# Altium PCB 800U R3N3_SENSOR_V1.3.PcbDoc
Units mm, origin at the board's own origin, x right, y up, seen from the top; angles counter-clockwise.
Board outline 152.4 x 101.6 mm, 2 copper layers (Top Layer, Bottom Layer); 17 components, 10 nets, 29 pads, 17 vias.
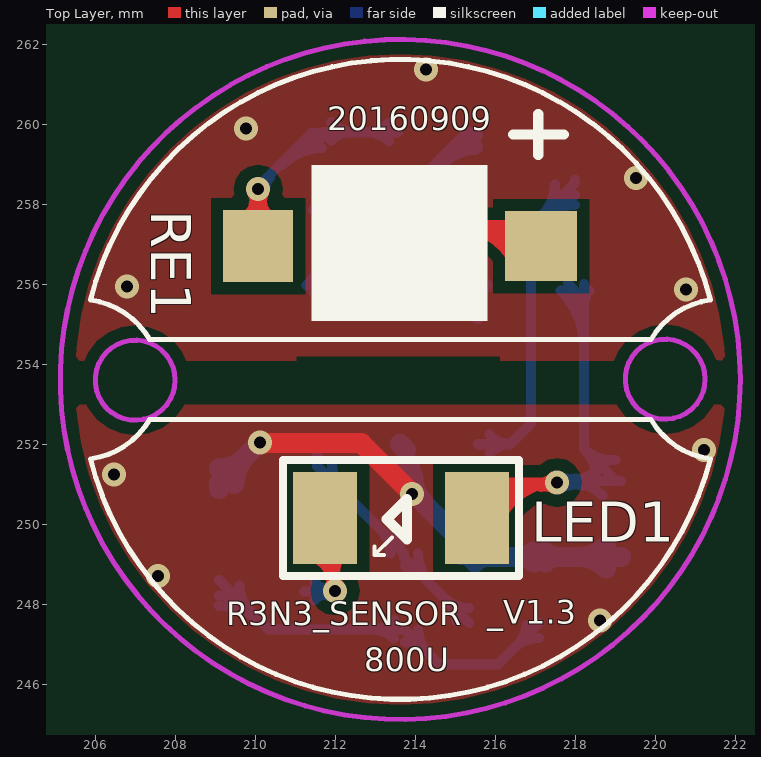
[diagram p0: Top Layer view]
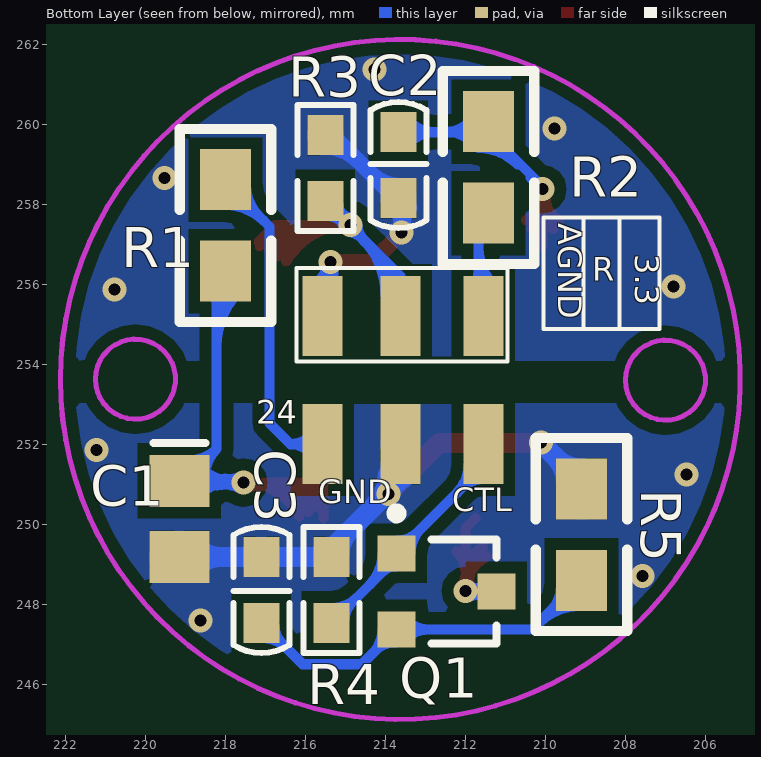
[diagram p1: Bottom Layer view, seen from below]

## Layer stack, top to bottom
Top Layer: signal copper 0.0356
Dielectric: dielectric 0.32, FR-4, Dk 4.8
Bottom Layer: signal copper 0.0356

## Board outline
162.425,214.025 314.825,214.025 314.825,315.625 162.425,315.625

## Design rules (kind name [scope] priority, off if disabled: settings)
Clearance [All] p1: gap=0.3
PlaneConnect [Isvia] p1: planeconnectstyle=Relief reliefexpansion=0.508 reliefentries=4 reliefconductorwidth=0.254 reliefairgap=0.254
PolygonConnect [Isvia] p1: connectstyle=Direct reliefconductorwidth=0.254 reliefentries=4 polygonreliefangle="90 Angle" airgapwidth=0.254
RoutingVias [All] p1: holewidth=0.3 width=0.6 viastyle="Through Hole" minholewidth=0.3 minwidth=0.6 maxholewidth=0.3 maxwidth=0.6
SilkToSolderMaskClearance SilkscreenOverComponentPads [IsPad] p1: minsilkscreentomaskgap=0.254 clearancetoexposedcopper=TRUE
SolderMaskExpansion [All] p1: expansion=0.102
Width [All] p1: maxlimit=0.6 minlimit=0.254 preferedwidth=0.254 minimp=50.000000 maximp=50.000000 favimp=50.000000
26 further rules are at their usual default settings.

## Classes and differential pairs
component class "800U R3N3_TR": 3.3 24 C1 C2 C3 CTL GND LED1 Q1 R R1 R2 R3 R4 R5 RE1

## Components (designator, comment, footprint, x,y, rotation, side; value= is the part's Value field where it differs from the comment)
3.3 "" HOLE_SMD 211.55,255.21 r180 bottom (schematic designator 2)
24 "" HOLE_SMD 215.575,252 r180 bottom (schematic designator 1)
AGND "" HOLE_SMD 215.575,255.21 r180 bottom (schematic designator LEDCTL1)
C1 "105" C0805 219.15,250.13 r270 bottom
C2 "105" C0603 213.675,259.8 r270 bottom
C3 "102" C0603 217.1,247.53 r90 bottom
CTL "" HOLE_SMD 211.55,252 r180 bottom (schematic designator LEDCTL1)
GND "" HOLE_SMD 213.625,252 r180 bottom (schematic designator GND1)
LED1 "SIR67-21C" LED-3.5X2.8 213.65,250.15 r180 top locked
Q1 "MMBT5551" SOT-23 212.475,248.32 r270 bottom
R "" HOLE_SMD 213.625,255.21 r180 bottom (schematic designator LED_R1)
R1 "100" R0805 218,257.47 r90 bottom
R2 "100" R0805 211.425,258.92 r270 bottom
R3 "10K" R0603 215.5,259.725 r270 bottom
R4 "10K" R0603 215.35,249.18 r270 bottom
R5 "15" R0805 209.1,249.74 r270 bottom
RE1 "PD70-01C" LED9*4 213.65,256.95 r90 top locked

## Footprints (in the part's own frame and the unit in brackets; to place one, negate y for a bottom-side part, rotate by r counter-clockwise, add the part's x,y. Pads: shape width x height; smd on the part's side, far side on the other; paste and mask are expansions set on the pad)
C0603 [mm]
  rect 1x0.9 smd: 1(0,0) 2(1.65,0)
  silkscreen extent -0.75,-0.7 2.4,0.7
C0805 [mm] "Chip Capacitor; Body 2.0 x"
  rect 1.3x1.5 smd: 1(-0.95,0) 2(0.95,0)
  silkscreen extent -1.9,-0.65 -1.9,0.65
HOLE_SMD [mm]
  rect 1x2 smd: 1(0,0)
LED9*4 [mm]
  rect 1.75x1.8 smd: 1(0,-3.5)
  rect 1.8x1.75 smd: 2(0,3.575)
  silkscreen extent -1.87,-4.06 3.3,2.24
LED-3.5X2.8 [mm]
  rect 1.6x2.3 smd: 1(-1.9,0) 2(1.9,0)
  silkscreen extent -2.95,-1.45 2.95,1.45
R0603 [mm]
  rect 1x0.9 smd: 1(0,0) 2(1.65,0)
  silkscreen extent -0.75,-0.7 2.4,0.7
R0805 [mil]
  rect 60x50 smd: 1(-45,0) 2(45,0)
  silkscreen extent -95,-45 95,45
SOT-23 [mm] "SOT-23; 3 Leads; Body 3.0 x 2.6 mm"
  rect 0.9x0.95 smd: 1(-0.95,-1.25) 2(0.95,-1.25) 3(0,1.25)
  silkscreen extent -2.07,-1.38 1.3,1.25

## Part data
3.3 24 AGND CTL GND R: library part 焊
C1: library part Cap, "贴片电容"
C2 C3: library part Cap, "贴"
LED1: library part LED0, "贴"
Q1: library part NPN, "贴片NPN三极管"
R1 R2 R3 R4 R5: library part "Res Semi", "贴"
RE1: library part "Photo Sen", "贴"

## Via types
v1: diameter 0.6, hole 0.3, Top Layer to Bottom Layer, 17 vias

## Nets (pads, with @x,y where several pads share a name; then routed paths per layer and width w, separated by ;. In a path a pad name is that pad's centre, name@x,y a point inside that pad or via, vN(x,y) a via of type N, cw(c..) or ccw(c..) an arc to the next point about the centre after c; other vN are vias at no path point)
3.3V: 3.3.1 R2.2 | length 6
  Bottom Layer w0.254: 3.3.1@211.286,255.974 ccw(c210.348,256.912) 211.675,256.912 ; R2.2@211.447,257.847 cw(c210.895,257.295) 211.675,257.295 cw(c212.455,257.295) R2.2@211.903,257.847 ; 3.3.1@211.466,255.794 ccw(c210.961,256.299) 211.675,256.299 ; 211.675,256.309 ccw(c212.149,256.309) 3.3.1@211.814,255.974 ; R2.2@211.675,258.125 211.675,255.575 3.3.1@211.875,255.375
+24V: 24.1 R1.2 | length 11.8
  Bottom Layer w0.254: 24.1 216.375,252 ; 24.1@215.861,251.76 cw(c216.375,251.329) 216.375,252 ; 24.1@215.861,252.24 ccw(c216.375,252.671) 216.375,252 ; 217.041,257.581 cw(c218,256.621) R1.2@218,257.978 ; 217.171,257.711 ccw(c216.396,258.486) R1.2@217.492,258.486 ; R1.2@217.474,258.014 cw(c218,257.488) R1.2@218,258.232 ; R1.2 218,258.54 216.9,257.44 216.9,252.525 216.375,252
AGND: AGND.1 C2.2 R3.1 | length 11.4
  Top Layer w0.4: v1(213.6,257.29) 214.33,256.56 v1(215.375,256.56)
  Bottom Layer w0.4: C2.2@213.398,257.923 cw(c212.971,257.496) 213.575,257.496 cw(c214.179,257.496) C2.2@213.752,257.923 ; v1@213.513,257.34 ccw(c213.218,257.511) 213.548,257.599 ; 213.575,257.592 ccw(c213.902,257.592) v1@213.671,257.361 ; C2.2@213.575,258.15 C2.2@213.575,257.975 ; C2.2@213.575,258.45 ccw(c213.575,259.597) 214.386,258.786 ; v1(213.6,257.29) 213.575,257.315 C2.2@213.575,257.975 ; C2.2@213.621,257.668 ccw(c213.985,257.571) v1@213.681,257.349 ; 214.689,259.089 cw(c215.5,258.278) R3.1@215.5,259.425 ; R3.1 215.325,259.725 C2.2@213.575,257.975 ; AGND.1 215.375,255.41 v1(215.375,256.56) ccw(c216.047,256.56) AGND.1@215.721,255.972
  other v1: 220.775,255.87 206.8,255.94 219.525,258.65 209.775,259.89 214.275,261.37
GND: C1.2 C3.2 GND.1 R4.1 R5.1 | length 20.9
  Top Layer w0.5: v1@210.105,252.03 212.655,252.03 v1(213.925,250.76)
  Bottom Layer w0.5: R5.1 209.1,251.025 v1(210.115,252.04) ; R5.1@209.1,251.395 ccw(c209.1,252.288) 209.732,251.657 ; R5.1@209.485,251.01 cw(c210.451,251.01) 209.768,251.693 ; GND.1 GND.1@213.775,251.85 ; GND.1@213.7,251.3 213.55,251.15 213.585,251.15 215.35,249.385 R4.1 C3.2 C1.2 ; GND.1@213.875,251.5 ccw(c215.42,251.5) 214.328,250.407 ; v1@213.882,250.786 ccw(c213.398,251.077) GND.1@213.946,251.213 ; v1@213.918,250.711 cw(c213.842,250.206) 214.252,250.509 ; 214.899,249.836 cw(c214.293,249.23) R4.1@215.15,249.23 ; R4.1@215.491,249.039 cw(c215.833,248.697) 215.833,249.18 cw(c215.833,249.663) R4.1@215.491,249.321 ; C3.2@216.959,249.039 ccw(c216.617,248.697) 216.617,249.18 ccw(c216.617,249.663) C3.2@216.959,249.321 ; C3.2@217.241,249.039 cw(c217.583,248.697) 217.583,249.18 cw(c217.583,249.663) C3.2@217.241,249.321 ; C1.2@218.767,248.897 ccw(c218.084,248.214) 218.084,249.18 ccw(c218.084,250.146) C1.2@218.767,249.463
  other v1: 218.625,247.59 207.575,248.7 206.475,251.24 221.225,251.85
LEDCTL: CTL.1 Q1.1 R4.2 | length 11.1
  Bottom Layer w0.254: CTL.1@211.55,251.127 cw(c211.55,250.359) 212.093,250.902 ; CTL.1 211.55,251.445 Q1.1 213.725,249.155 R4.2 ; CTL.1@211.923,251.5 ccw(c212.956,251.5) 212.226,250.769 ; 213.131,249.864 cw(c212.537,249.27) Q1.1@213.377,249.27 ; 213.191,249.804 ccw(c213.7,250.312) Q1.1@213.7,249.593 ; Q1.1@213.75,248.947 cw(c213.75,248.505) 214.062,248.818 ; Q1.1@214.073,249.27 ccw(c215.191,249.27) 214.4,248.48 ; 214.713,248.167 ccw(c215.35,248.803) R4.2@215.35,247.903 ; 214.834,248.046 cw(c214.368,247.58) R4.2@215.027,247.58
NetC1_1: C1.1 LED1.1 R1.1 | length 25.2
  Top Layer w0.254: LED1.1@215.471,250.541 cw(c216.294,250.113) LED1.1@216.294,251.04 ; LED1.1 215.55,250.95 215.64,251.04 v1(217.55,251.04) ccw(c217.55,249.458) LED1.1@216.147,250.189 ; LED1.1@215.696,250.424 cw(c216.712,249.894) 216.712,251.04 ; LED1.1@215.922,250.306 cw(c217.131,249.676) 217.131,251.04 ; v1@217.4,251.127 cw(c217.039,251.335) 217.147,250.932 cw(c217.255,250.528) v1@217.463,250.89 ; v1@217.428,250.918 ccw(c217.132,250.622) 217.132,251.04 ccw(c217.132,251.458) v1@217.428,251.162
  Bottom Layer w0.254: v1(217.55,251.04) 217.59,251.08 C1.1 219.025,251.08 218.225,251.88 ; v1@217.636,250.89 cw(c218.016,250.233) 218.213,250.966 ; v1@217.636,251.19 ccw(c217.884,251.619) 218.012,251.14 ; R1.1@217.641,255.841 cw(c216.23,254.43) 218.225,254.43 ; v1@217.672,250.918 cw(c218.064,250.526) 218.064,251.08 ; v1@217.672,251.162 ccw(c217.871,251.361) 217.871,251.08 ; v1@217.7,250.954 cw(c217.994,250.784) 217.906,251.112 ; R1.1@217.82,256.02 cw(c216.844,255.044) 218.225,255.044 ; 218.225,255.517 cw(c218.683,255.517) R1.1@218.359,255.841 ; R1.1@218.225,256.007 218.225,251.88 ; C1.1@218.527,251.103 ccw(c217.493,251.147) 218.225,251.88 ; C1.1@218.68,250.71 ccw(c217.787,249.817) 217.787,251.08 ccw(c217.787,252.343) C1.1@218.68,251.45 ; C1.1@219.001,251.601 cw(c218.91,252.565) 218.225,251.88
NetC2_1: C2.1 R2.1 RE1.2 | length 15.3
  Top Layer w0.254: RE1.2@209.659,257.597 ccw(c209.139,258.375) v1(210.075,258.375) ; RE1.2@209.8,257.386 ccw(c209.457,257.9) 210.075,257.9 ccw(c210.693,257.9) RE1.2@210.35,257.386 ; v1@209.925,258.288 cw(c209.563,258.08) 209.967,257.972 cw(c210.37,257.864) v1@210.162,258.225 ; v1@209.953,258.253 cw(c209.657,257.957) 210.075,257.957 cw(c210.493,257.957) v1@210.197,258.253 ; v1@209.988,258.225 cw(c209.78,257.864) 210.183,257.972 cw(c210.587,258.08) v1@210.225,258.288 ; RE1.2 v1(210.075,258.375) ; RE1.2@210.491,257.597 cw(c211.011,258.375) v1(210.075,258.375)
  Bottom Layer w0.254: v1@210.025,258.39 R2.1@211.425,259.79 ; v1@210.075,258.548 ccw(c210.075,258.966) 210.37,258.67 ccw(c210.666,258.375) v1@210.248,258.375 ; 210.697,258.997 cw(c211.675,258.019) R2.1@211.675,259.402 ; R2.1@211.13,259.43 cw(c211.675,258.886) R2.1@211.675,259.656 ; R2.1@211.475,259.775 211.675,259.775 211.7,259.8 C2.1@213.575,259.8 ; R2.1@211.903,259.597 cw(c212.394,259.106) 212.394,259.8 ; R2.1@211.903,260.053 ccw(c212.515,260.665) 212.515,259.8 ; C2.1@213.347,259.572 ccw(c212.795,259.02) 212.795,259.8 ccw(c212.795,260.58) C2.1@213.347,260.028
NetC3_1: C3.1 Q1.2 R5.2 | length 15.6
  Bottom Layer w0.254: R5.2@209.1,247.962 cw(c209.1,246.429) 210.184,247.513 ; R5.2@209.1,248.216 cw(c209.1,247.296) 209.75,247.947 ; R5.2 210.327,247.37 Q1.2 214.595,246.5 216.07,246.5 C3.1 ; R5.2@209.608,248.47 ccw(c210.528,248.47) 209.877,247.82 ; Q1.2@213.472,247.142 ccw(c212.92,246.59) 212.92,247.37 ccw(c212.92,248.15) Q1.2@213.472,247.598 ; Q1.2@213.75,247.047 cw(c213.75,246.328) 214.259,246.836 ; Q1.2@214.073,247.37 ccw(c214.913,247.37) 214.319,246.776 ; 216.463,246.893 cw(c217.1,246.257) C3.1@217.1,247.157 ; 216.584,247.014 ccw(c216.118,247.48) C3.1@216.777,247.48
NetLED1_2: LED1.2 Q1.3 | length 9.5
  Top Layer w0.254: LED1.2@211.45,249.198 cw(c211.007,248.309) v1@212,248.309 ; LED1.2@211.563,249.425 cw(c211.212,248.719) 212,248.719 ; LED1.2 212,249.9 v1(212,248.33) ; v1@211.85,248.417 ccw(c211.505,248.616) 211.89,248.719 ; v1@211.878,248.452 ccw(c211.582,248.748) 212,248.748 ccw(c212.418,248.748) v1@212.122,248.452 ; 211.883,248.745 ccw(c212.305,248.858) v1@212.086,248.48 ; 212,248.779 cw(c212.771,248.779) LED1.2@212.226,249.324
  Bottom Layer w0.254: Q1.3 v1@212,248.32 ; Q1.3@211.485,248.098 cw(c212,247.611) v1@212,248.32 ; Q1.3@211.485,248.542 ccw(c212,249.029) v1@212,248.32 ; Q1.3@211.558,248.32 ccw(c211.558,248.772) v1@211.878,248.452 ; Q1.3@211.606,248.32 cw(c211.606,247.936) v1@211.878,248.208 ; v1@211.843,248.258 ccw(c211.589,248.141) 211.662,248.411 ccw(c211.726,248.652) v1@211.888,248.462 ; v1@211.842,248.401 cw(c211.545,248.537) 211.629,248.221 cw(c211.724,247.867) v1@211.911,248.181 ; v1(212,248.33) v1@212,248.32
NetLED_R1_1: R3.2 R.1 RE1.1 | length 21.3
  Top Layer w0.254: v1@214.962,257.33 cw(c215.17,256.968) 215.278,257.372 cw(c215.386,257.775) v1@215.025,257.567 ; v1@214.997,257.358 cw(c215.293,257.062) 215.293,257.48 cw(c215.293,257.898) v1@214.997,257.602 ; 215.322,257.48 cw(c215.322,255.875) RE1.1@216.701,256.697 ; 215.769,257.48 cw(c215.769,256.142) RE1.1@216.919,256.827 ; 216.217,257.48 cw(c216.217,256.408) RE1.1@217.137,256.957 ; RE1.1@216.483,256.567 ccw(c214.875,255.609) v1(214.875,257.48) 216.755,257.48 RE1.1@217.175,257.06 ; RE1.1@216.925,257.175 RE1.1
  Bottom Layer w0.254: R.1@213.49,255.71 cw(c214.347,255.71) 213.741,256.316 ; R.1@213.625,255.375 213.625,256.2 R3.2 R3.2@215.595,258.17 ; R.1@213.744,255.71 cw(c215.214,255.71) 214.175,256.75 ; R.1@213.998,255.71 cw(c216.081,255.71) 214.608,257.183 ; 214.524,257.061 cw(c215.017,256.723) v1@214.907,257.31 ; 214.558,257.133 ccw(c214.212,257.48) v1@214.702,257.48 ; 214.631,257.206 cw(c214.875,256.962) v1@214.875,257.307 ; v1@214.843,257.65 ccw(c214.755,258.122) R3.2@215.17,257.882 ; v1@214.863,257.438 cw(c215.5,256.802) R3.2@215.5,257.702 ; v1@214.875,257.653 ccw(c214.875,258.143) R3.2@215.222,257.797 ; v1@214.94,257.64 ccw(c215.073,257.972) R3.2@215.252,257.663 ; v1@214.984,257.559 ccw(c214.518,258.025) R3.2@215.177,258.025 ; v1@215.042,257.435 cw(c215.346,257.354) R3.2@215.189,257.626 ; v1@215.048,257.48 cw(c215.393,257.48) R3.2@215.149,257.724

## Polygon pours and split planes (outlines as drawn)
AGND on Top Layer "B" (solid, remove dead copper, pour order 2): 205.225,262.1 222.075,262.1 222.075,254.215 222.2,254.09 205.225,254.09
GND on Top Layer "T" (solid, remove dead copper, pour order 8): 205.175,252.99 222.175,252.99 222.175,245.14 205.345,245.14 205.225,245.26 205.195,245.23 205.175,245.23
AGND on Bottom Layer "B" (solid, remove dead copper, pour order 4): 205.125,262.1 222.05,262.1 222.05,254.09 205.1,254.09 205.15,254.14 205.15,262.08
GND on Bottom Layer "B" (solid, remove dead copper, pour order 6): 205,253.02 222.525,253.02 222.525,245.045 222.5,245.02 205.065,245.02 205.025,244.98

## Keep-outs
Keep-Out Layer:
  circle w0.127: c207,253.6 r1
  circle w0.127: c220.25,253.625 r1
  circle w0.127: c213.629,253.619 r8.5

## Other copper
Top Layer:
  pour cut-out: 211.025,254.2 216.125,254.2 216.125,253 211.025,253
Bottom Layer:
  pour cut-out: 211.025,254.2 216.125,254.2 216.125,253 211.025,253
  pour cut-out: 214.3,256.24 216.31,256.24 216.34,256.21 216.34,254.18 214.285,254.18 214.275,254.17

## Silkscreen, mask and mechanical layers (free items; w line width, h text height)
Top Overlay:
  lines w0.127: 205.879,251.635 ccw(c205.629,253.619) 207.362,252.621 219.896,252.621 ccw(c221.629,253.619) 221.379,251.635 cw(c213.629,253.619) 205.879,251.635 ; 205.879,255.603 cw(c205.629,253.619) 207.362,254.617 219.896,254.617 cw(c221.629,253.619) 221.379,255.603 ccw(c213.629,253.619) 205.879,255.603
  text "20160909" at 211.8,259.65 h1
  text "_V1.3" at 215.8,247.31 h1
  text "R3N3_SENSOR" at 209.275,247.27 h1
  text "800U" at 212.725,246.12 h1
Bottom Overlay:
  lines w0.1: 208.15,254.91 208.15,257.63 ; 209.05,254.91 209.05,257.63 ; 207.15,254.88 207.15,257.67 210.05,257.67 210.05,254.88 207.15,254.88 ; 210.95,254.07 210.95,256.4 216.225,256.4 216.225,254.07 210.95,254.07
Mechanical 1:
  circle w0.127: c207,253.6 r1
  circle w0.127: c220.25,253.625 r1
  circle w0.127: c213.629,253.619 r8.5
  lines w0.2: 210.775,253 216.35,253 216.35,254.2 210.775,254.2 210.775,253
Mechanical 3:
  lines w0.1: 205.1,253.6 222.129,253.6
  lines w0.127: 209.898,259.72 217.398,259.72 ; 209.987,259.723 ccw(c209.987,259.134) 209.398,259.134 209.398,254.72 ccw(c209.898,254.72) 209.898,254.22 217.398,254.22 ccw(c217.398,254.72) 217.898,254.72 217.898,259.22 ; 217.309,259.727 cw(c217.309,259.138) 217.898,259.138 ; 209.398,247.92 ccw(c209.898,247.92) 209.898,247.42 217.398,247.42 ccw(c217.398,247.92) 217.898,247.92 217.898,252.42 ccw(c217.398,252.42) 217.398,252.92 209.898,252.92 ccw(c209.898,252.42) 209.398,252.42 209.398,247.92
  lines w0.2: 213.625,245.45 213.625,261.5